# EAGLE board learning (EAGLE 9.3.0)
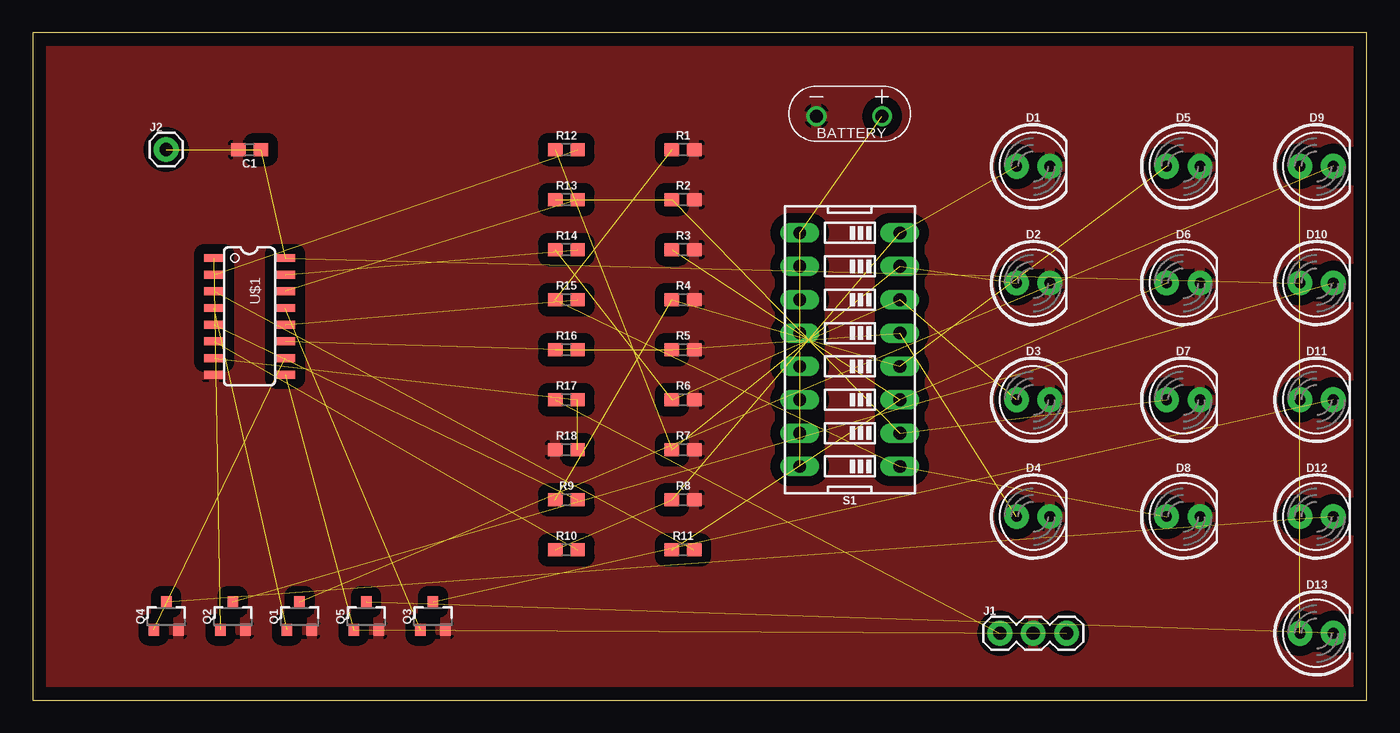
[diagram p0: board, top side]
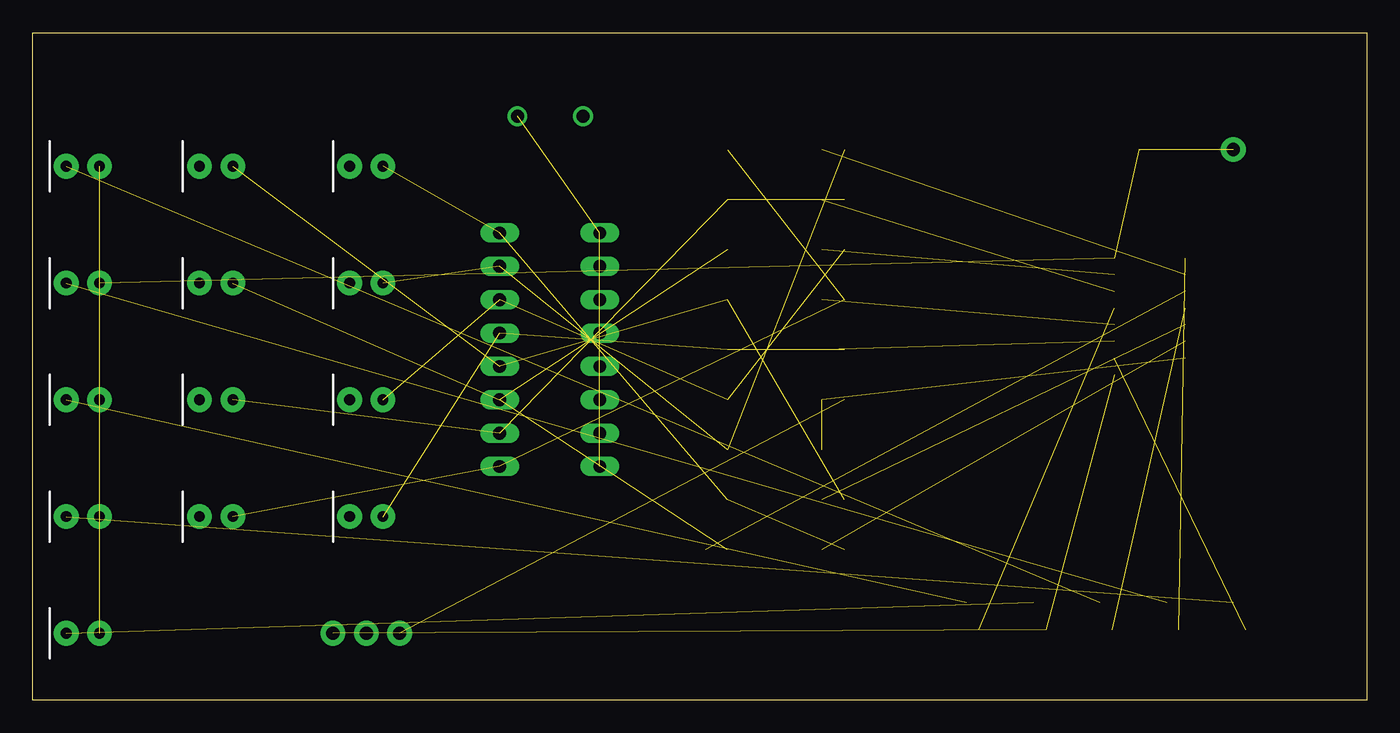
[diagram p1: board, bottom side, seen from below]

Size 101.6 x 50.8 mm. Coordinates in mm from the lower left corner, seen from the top.
Outline: 0,0 101.6,0 101.6,50.8 0,50.8 0,0
Copper layers (1*16): Top 0.035mm / dielectric 1.5mm / Bottom 0.035mm
Design rules "default": minimum track width 6mil, minimum drill 0.35mm, track to track 6mil, track to pad 6mil, pad to pad 6mil, via to via 6mil, smd to smd 6mil, copper to edge 40mil, drill to drill 6mil, minimum pad ring 10mil, minimum via ring 8mil, stop-mask expansion 4mil, vias tented up to drill 0mil, thermal gap 10mil

## Footprints (pad centres in the part's own frame; a part is rotated, then mirrored left to right if it is on the bottom)
0603 = smd 1.1 x 1: 1 -0.85,0; 2 0.85,0
LED_5MM = drill 0.813 pad 1.88: A -1.27,0; K 1.27,0
1X03 = drill 1.016 pad 1.88: 1 0,0; 2 2.54,0; 3 5.08,0
1X01 = drill 1.016 pad 1.88: 1 0,0
SOT23-3 = smd 0.8 x 0.9: 1 -0.95,-1; 2 0.95,-1; 3 0,1.1
DIPSWITCH-08 = drill 0.97 long: 1 -8.89,-3.81; 2 -6.35,-3.81; 3 -3.81,-3.81; 4 -1.27,-3.81; 5 1.27,-3.81; 6 3.81,-3.81; 7 6.35,-3.81; 8 8.89,-3.81; 9 8.89,3.81; 10 6.35,3.81; 11 3.81,3.81; 12 1.27,3.81; 13 -1.27,3.81; 14 -3.81,3.81; 15 -6.35,3.81; 16 -8.89,3.81
SO016 = smd 0.6 x 1.55: 1 -4.445,-2.7; 2 -3.175,-2.7; 3 -1.905,-2.7; 4 -0.635,-2.7; 5 0.635,-2.7; 6 1.905,-2.7; 7 3.175,-2.7; 8 4.445,-2.7; 9 4.445,2.7; 10 3.175,2.7; 11 1.905,2.7; 12 0.635,2.7; 13 -0.635,2.7; 14 -1.905,2.7; 15 -3.175,2.7; 16 -4.445,2.7
WIRE_LEADS = drill 1: P$1 0,0; P$2 5,0

## Placement (x,y rotation side)
C1  0.1uF  [0603]  16.51,41.91 180 top
D1  [LED_5MM]  76.2,40.64 0 top
D2  [LED_5MM]  76.2,31.75 0 top
D3  [LED_5MM]  76.2,22.86 0 top
D4  [LED_5MM]  76.2,13.97 0 top
D5  [LED_5MM]  87.63,40.64 0 top
D6  [LED_5MM]  87.63,31.75 0 top
D7  [LED_5MM]  87.63,22.86 0 top
D8  [LED_5MM]  87.63,13.97 0 top
D9  [LED_5MM]  97.79,40.64 0 top
D10  [LED_5MM]  97.79,31.75 0 top
D11  [LED_5MM]  97.79,22.86 0 top
D12  [LED_5MM]  97.79,13.97 0 top
D13  [LED_5MM]  97.79,5.08 0 top
J1  [1X03]  73.66,5.08 0 top
J2  [1X01]  10.16,41.91 0 top
Q1  [SOT23-3]  20.32,6.35 0 top
Q2  [SOT23-3]  15.24,6.35 0 top
Q3  [SOT23-3]  30.48,6.35 0 top
Q4  [SOT23-3]  10.16,6.35 0 top
Q5  [SOT23-3]  25.4,6.35 0 top
R1  10k  [0603]  49.53,41.91 0 top
R2  10k  [0603]  49.53,38.1 0 top
R3  10k  [0603]  49.53,34.29 0 top
R4  10k  [0603]  49.53,30.48 0 top
R5  10k  [0603]  49.53,26.67 0 top
R6  10k  [0603]  49.53,22.86 0 top
R7  10k  [0603]  49.53,19.05 0 top
R8  10k  [0603]  49.53,15.24 0 top
R9  51  [0603]  40.64,15.24 0 top
R10  51  [0603]  40.64,11.43 0 top
R11  51  [0603]  49.53,11.43 0 top
R12  51  [0603]  40.64,41.91 0 top
R13  51  [0603]  40.64,38.1 0 top
R14  51  [0603]  40.64,34.29 0 top
R15  51  [0603]  40.64,30.48 0 top
R16  51  [0603]  40.64,26.67 0 top
R17  51  [0603]  40.64,22.86 0 top
R18  10k  [0603]  40.64,19.05 0 top
S1  [DIPSWITCH-08]  62.23,26.67 90 top
U$1  CD74HC283  [SO016]  16.51,29.21 270 top
U$2  AAA_BATTERIES  [WIRE_LEADS]  59.69,44.45 0 top

## Library data of the parts
C1 = SparkFun-Capacitors; PROD_ID: CAP-08604
D1-D13 = SparkFun-LED
J1 J2 = SparkFun-Connectors
Q1-Q5 = SparkFun-DiscreteSemi; PROD_ID: TRANS-00830
R1-R18 = SparkFun-Resistors
S1 = SparkFun-Switches; PROD_ID: SWCH-12197; SF_SKU: COM-08034
U$1 U$2 = Soldering Workshop Library

## Nets
3.3V: C1.1 D9.A D10.A D11.A D12.A D13.A J2.1 U$1.16
A0: D5.A R4.1 R9.1 S1.4
A1: D6.A R3.1 R11.1 S1.3
A2: D7.A R2.1 R13.1 S1.2
A3: D8.A R1.1 R15.1 S1.1
B0: D1.A R8.1 R10.1 S1.8
B1: D2.A R7.1 R12.1 S1.7
B2: D3.A R6.1 R14.1 S1.6
B3: D4.A R5.1 R16.1 S1.5
CIN: J1.1 R17.1
COUT: J1.3 Q5.1 U$1.9
GND: C1.2 D1.K D2.K D3.K D4.K D5.K D6.K D7.K D8.K J1.2 Q1.2 Q2.2 Q3.2 Q4.2 Q5.2 R1.2 R2.2 R3.2 R4.2 R5.2 R6.2 R7.2 R8.2 R18.1 U$1.8 U$2.P$1
N$1: R10.2 U$1.6
N$2: R12.2 U$1.2
N$3: R13.2 U$1.14
N$4: R15.2 U$1.12
N$5: R17.2 R18.2 U$1.7
N$6: R14.2 U$1.15
N$7: R9.2 U$1.5
N$8: R16.2 U$1.11
N$9: R11.2 U$1.3
N$10: D9.K Q1.3
N$11: D10.K Q2.3
N$12: D11.K Q3.3
N$13: D12.K Q4.3
N$14: D13.K Q5.3
N$15: Q1.1 U$1.4
N$16: Q2.1 U$1.1
N$17: Q3.1 U$1.13
N$18: Q4.1 U$1.10
VCC: S1.9 S1.10 S1.11 S1.12 S1.13 S1.14 S1.15 S1.16 U$2.P$2

## Tracks (layer width: path | path; a pad name or v marks a point on that pad's centre or on a via)
3.3V  (7 unrouted)
A0  (3 unrouted)
A1  (3 unrouted)
A2  (3 unrouted)
A3  (3 unrouted)
B0  (3 unrouted)
B1  (3 unrouted)
B2  (3 unrouted)
B3  (3 unrouted)
CIN  (1 unrouted)
COUT  (2 unrouted)
GND
  pour Top (isolate 0.762): 0,50.8 101.6,50.8 101.6,0 0,0
N$1  (1 unrouted)
N$2  (1 unrouted)
N$3  (1 unrouted)
N$4  (1 unrouted)
N$5  (2 unrouted)
N$6  (1 unrouted)
N$7  (1 unrouted)
N$8  (1 unrouted)
N$9  (1 unrouted)
N$10  (1 unrouted)
N$11  (1 unrouted)
N$12  (1 unrouted)
N$13  (1 unrouted)
N$14  (1 unrouted)
N$15  (1 unrouted)
N$16  (1 unrouted)
N$17  (1 unrouted)
N$18  (1 unrouted)
VCC  (8 unrouted)